# Altium PCB RPI 3.PcbDoc
Units mil, origin at the board's own origin, x right, y up, seen from the top; angles counter-clockwise.
Board outline 2558.74 x 2204.72 mil, 4 copper layers (Top Layer, Internal Plane 2, Internal Plane 1, Bottom Layer), stack 89.2 mil thick; 44 components, 50 nets, 159 pads, 17 vias.
Unrouted connection lines stored in the file: 1.
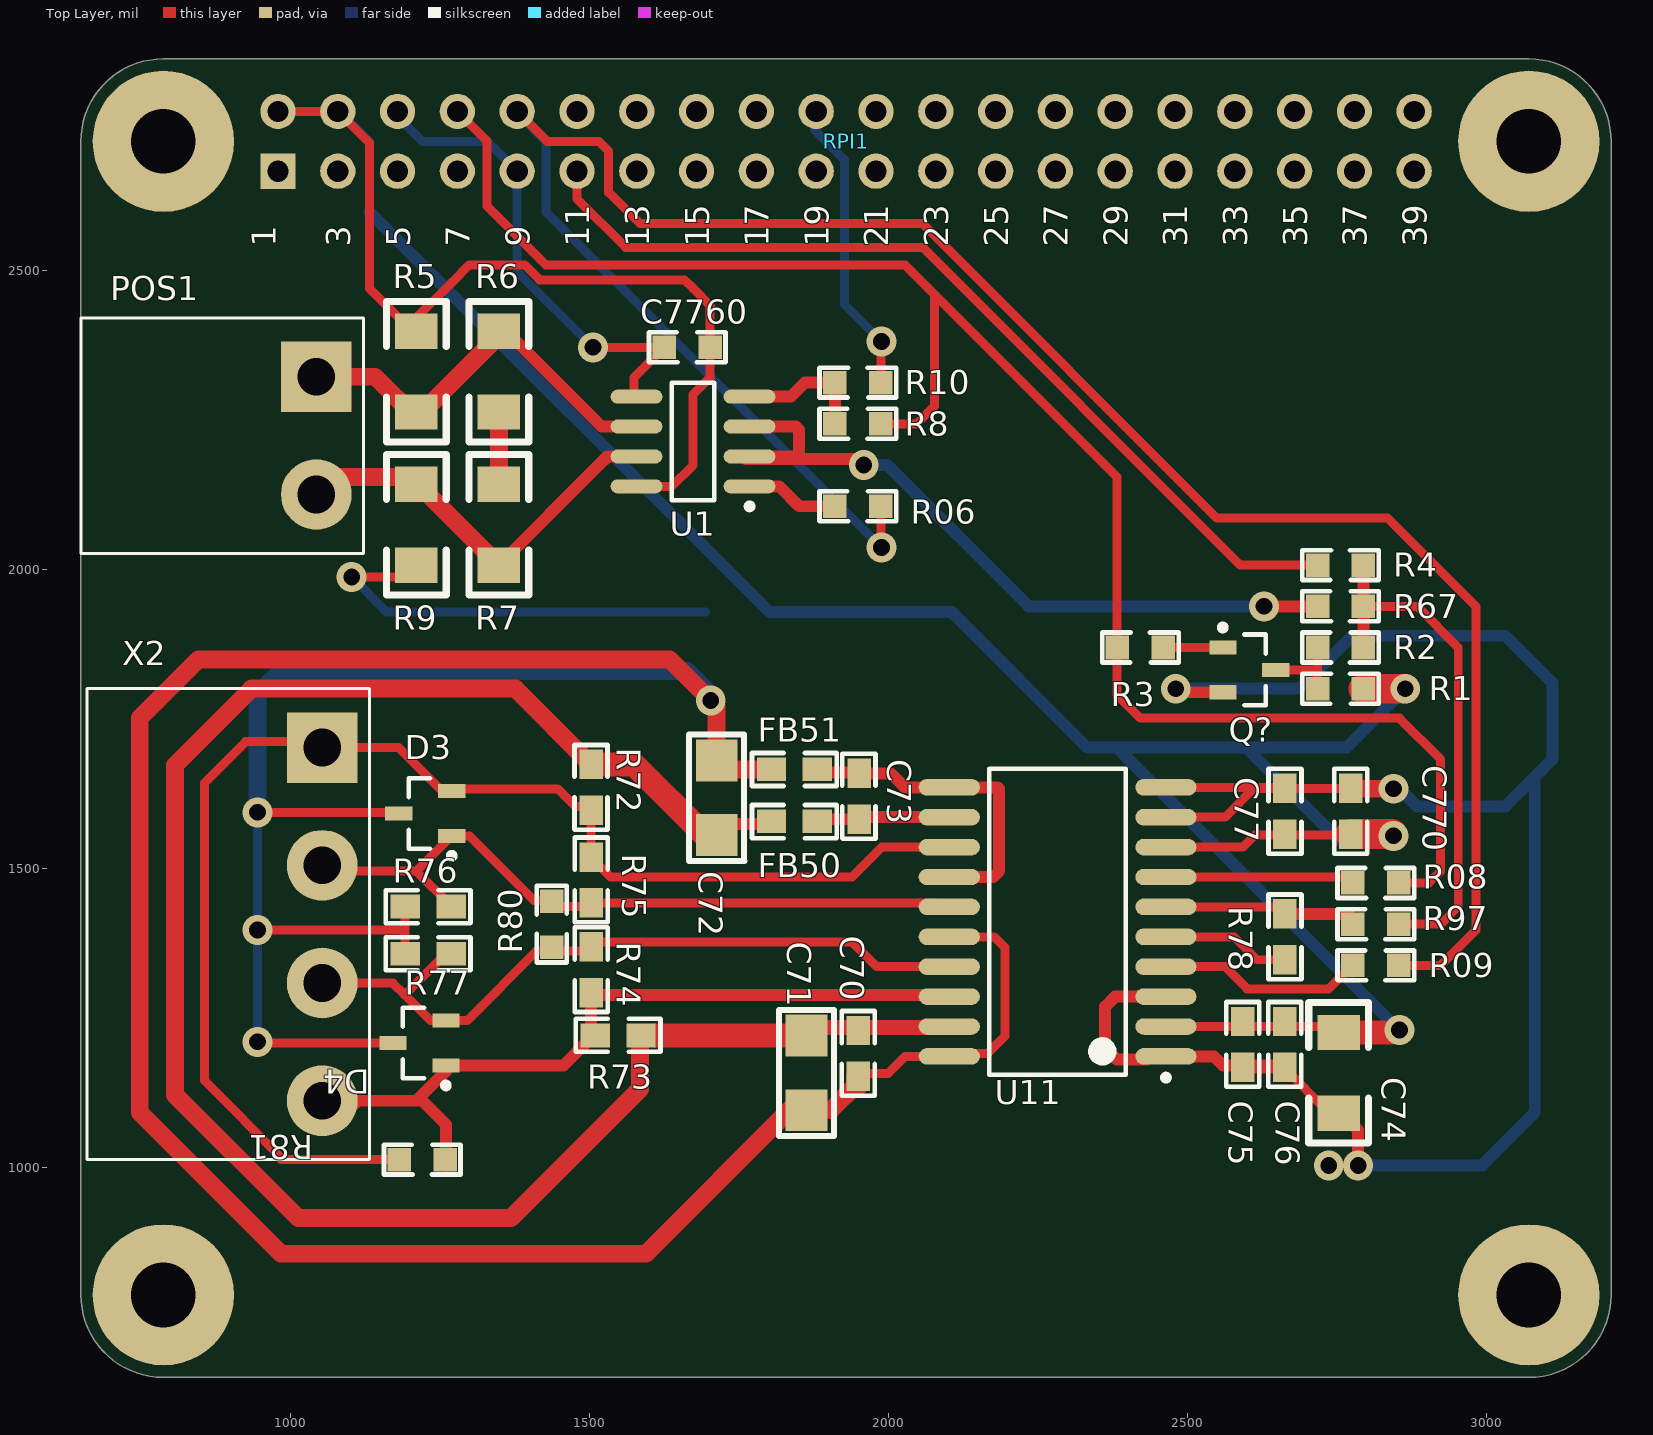
[diagram p0: Top Layer view]
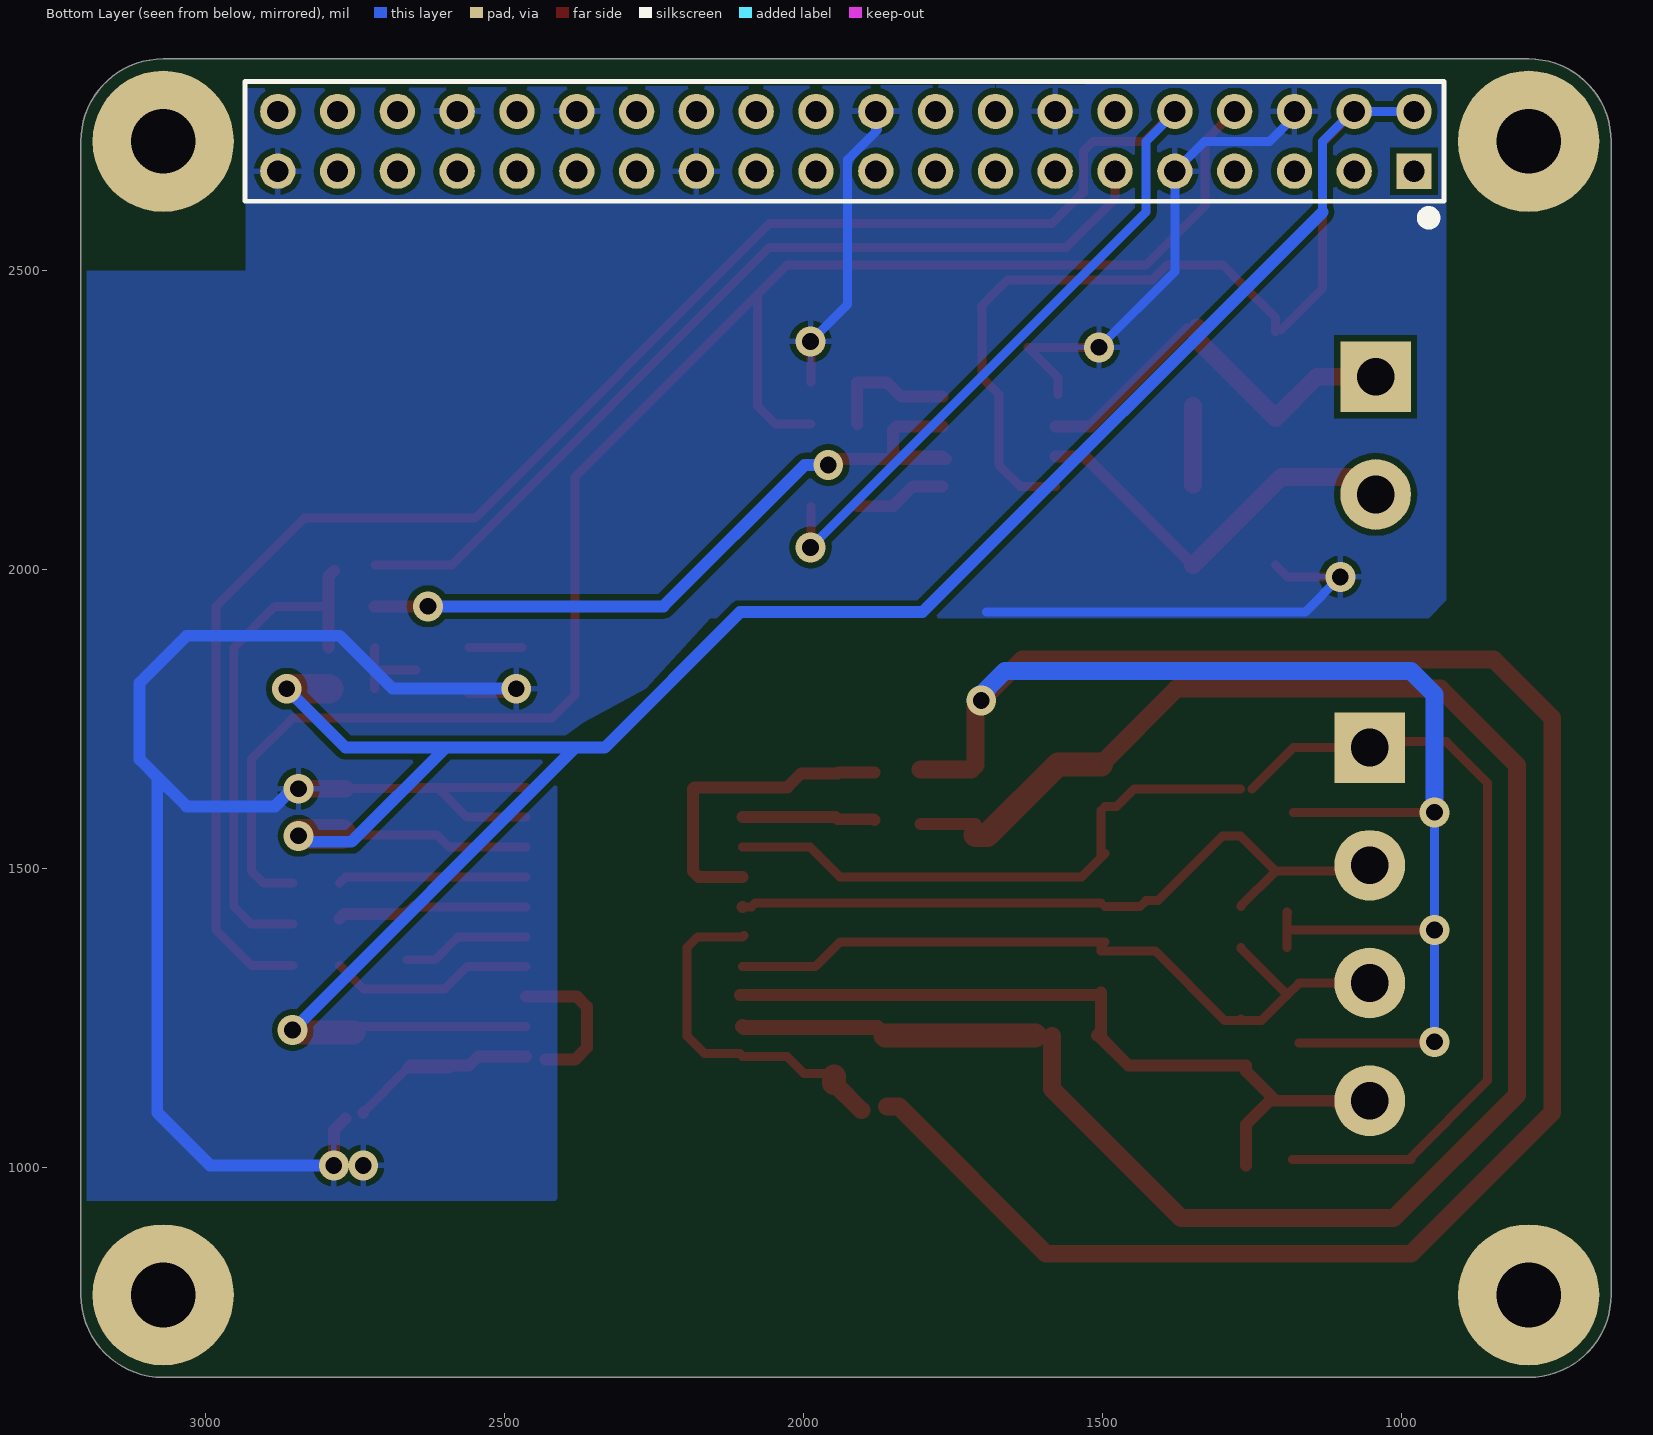
[diagram p1: Bottom Layer view, seen from below]
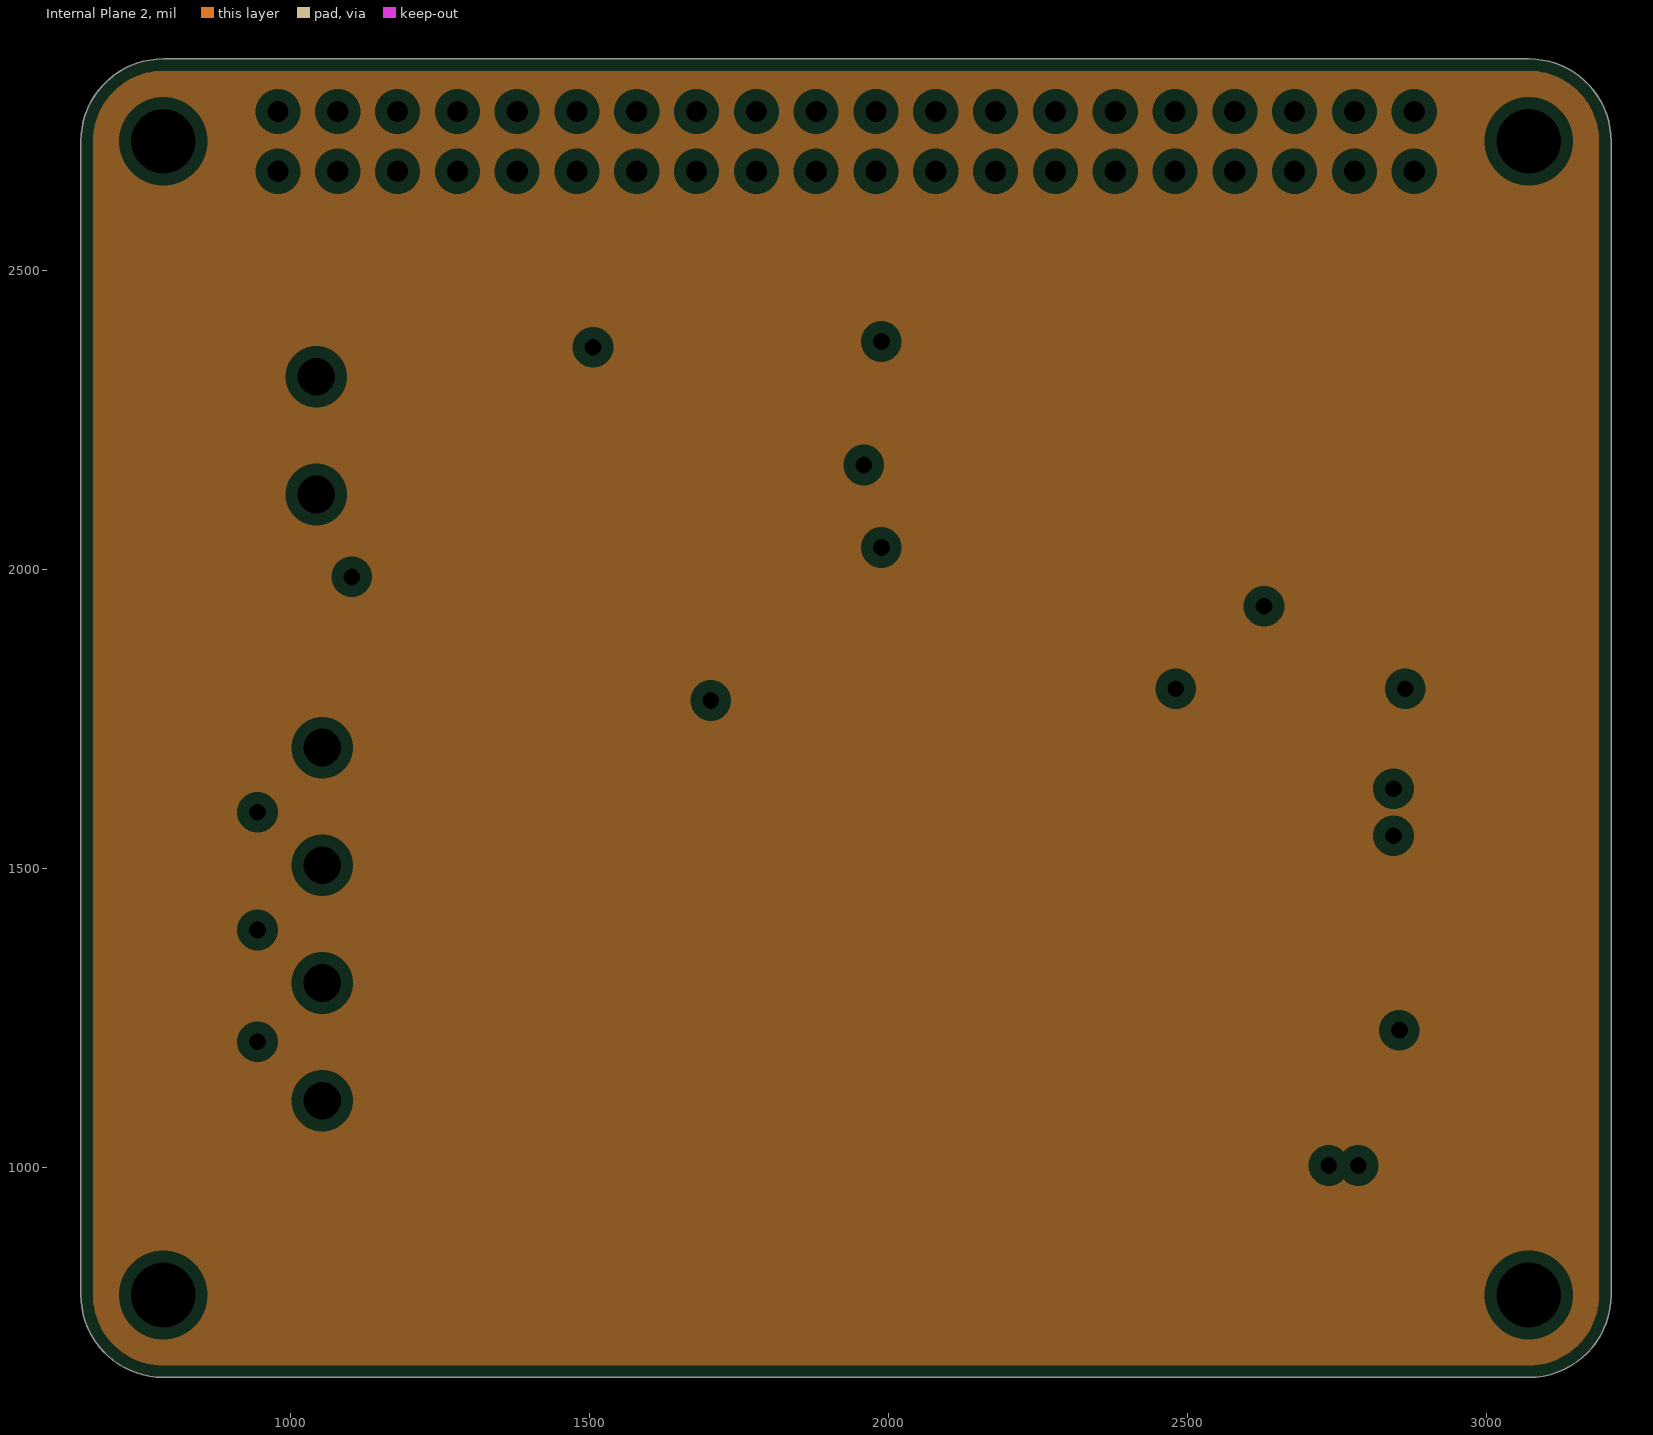
[diagram p2: Internal Plane 2, clearances drawn from the general rule]
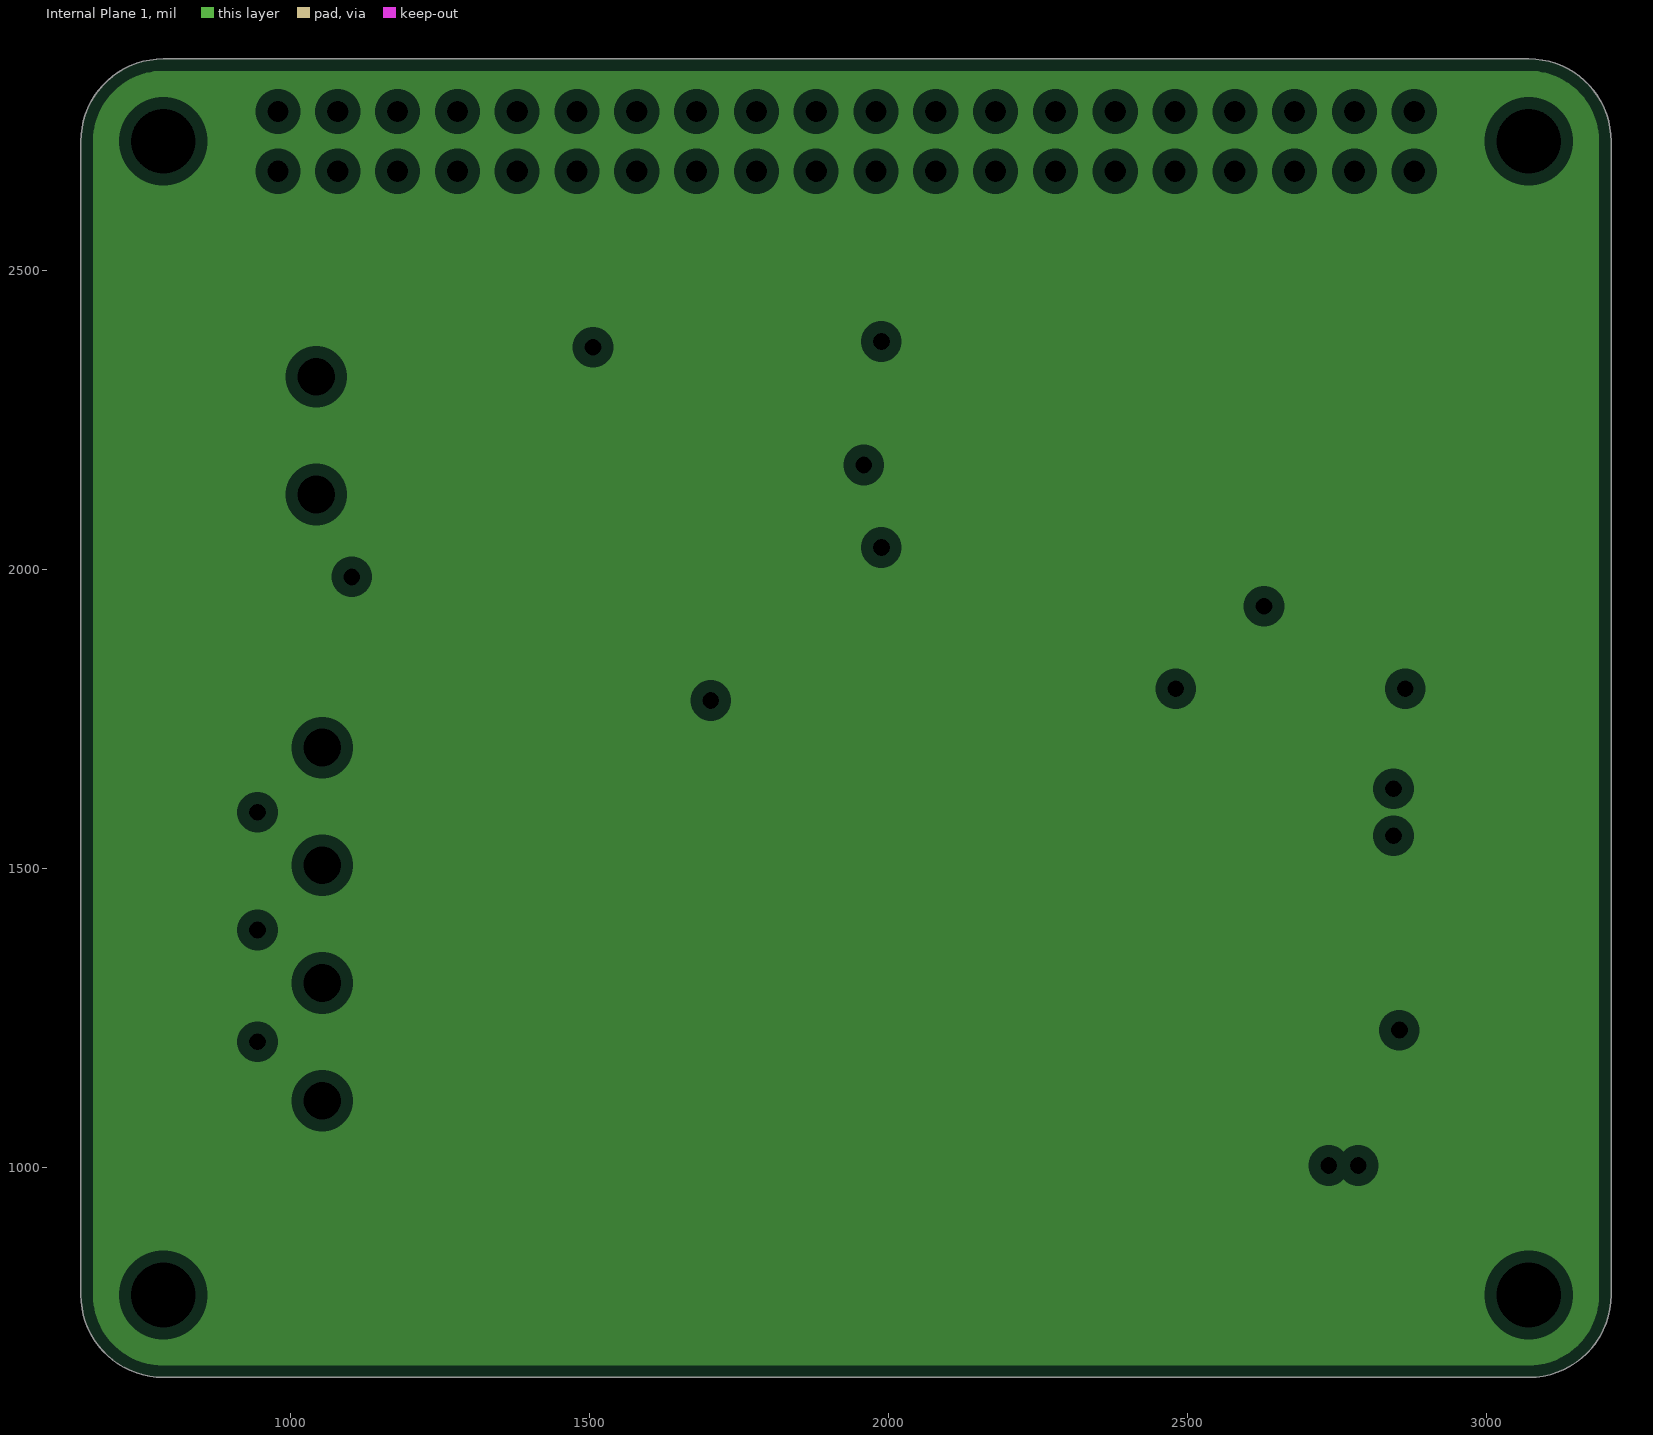
[diagram p3: Internal Plane 1, clearances drawn from the general rule]

## Layer stack, top to bottom
Top Solder: solder mask 0.8, Solder Resist, Dk 3.5
Top Layer: signal copper 2.1
Dielectric 1: dielectric 57, FR-4, Dk 4.6
Internal Plane 2: plane copper 1.4
Dielectric2: dielectric 12.6, FR-4, Dk 4.8
Internal Plane 1: plane copper 1.4
Dielectric3: dielectric 12.6, FR-4, Dk 4.8
Bottom Layer: signal copper 2.1
Bottom Solder: solder mask 0.8, Solder Resist, Dk 3.5

## Board outline
649.61,787.4 ccw(c787.4,787.4) 787.4,649.61 3070.87,649.61 ccw(c3070.71,787.24) 3208.35,787.4 3208.35,2716.54 ccw(c3070.71,2716.69) 3070.87,2854.33 787.4,2854.33 ccw(c787.4,2716.54) 649.61,2716.54

## Design rules (kind name [scope] priority, off if disabled: settings)
Clearance [All] p1: gap=10
PlaneClearance [All] p1: clearance=20
PlaneConnect [All] p1: planeconnectstyle=Relief reliefexpansion=20 reliefentries=4 reliefconductorwidth=10 reliefairgap=10
PolygonConnect [All] p1: connectstyle=Relief reliefconductorwidth=10 reliefentries=4 polygonreliefangle="90 Angle" airgapwidth=10
RoutingVias [All] p1: holewidth=28 width=50 viastyle="Through Hole" minholewidth=28 minwidth=50 maxholewidth=28 maxwidth=50
SolderMaskExpansion [All] p1: expansion=4
UnpouredPolygon [All] p1: allowunpoured=FALSE
Width [All] p1: maxlimit=30 minlimit=10 preferedwidth=10
27 further rules are at their usual default settings.

## Components (designator, comment, footprint, x,y, rotation, side; value= is the part's Value field where it differs from the comment)
C70 "1nF" 0603_LGP#1 1949.21,1191.32 r270 top
C71 "10nF" 1206#1 1862.78,1096.32 r90 top
C72 "10uf" 1206#1 1712.78,1556.32 r90 top
C73 "100nF" 0603_LGP#1 1950.78,1621.32 r90 top
C74 "10uF" 1206#2 2752.78,1226.32 r270 top
C75 "100nF" 0603_LGP#1 2592.78,1206.32 r90 top
C76 "10nF" 0603_LGP#1 2662.78,1206.32 r90 top
C77 "100nF" 0603_LGP#1 2662.78,1596.32 r270 top
C770 "10uF" 0603_LGP#1 2772.78,1596.32 r270 top
C7760 "10uF" 0603_LGP#2 1663.39,2372.05 r180 top
D3 "CDSOT23-SM712" SOT-23A_N 1269.69,1555.12 r270 top
D4 "CDSOT23-SM712" SOT-23A_N 1259.84,1171.26 r270 top
FB50 "" 0603_LGP#1 1842.78,1579.32 r180 top (schematic designator FB8)
FB51 "" 0603_LGP#1 1842.78,1666.32 r180 top
POS1 "Header 2" PHOENIX_RIGHT_A_2 1043.31,2224.41 r270 top
Q? "BC847AW" SOT-23A_N 2559.06,1870.08 r90 top
R1 "Res1" 0603_LGP#2 2755.91,1801.18 r0 top
R2 "Res1" 0603_LGP#2 2755.91,1870.08 r180 top
R3 "Res1" 0603_LGP#2 2421.26,1870.08 r0 top
R4 "Res1" 0603_LGP#2 2755.91,2007.87 r0 top
R5 "Res1" 1206#2 1210.63,2263.78 r90 top
R06 "Res1" 0603_LGP#2 1948.82,2106.3 r180 top
R6 "Res1" 1206#2 1348.43,2263.78 r90 top
R7 "Res1" 1206#2 1348.43,2007.87 r90 top
R08 "Res1" 0603_LGP#2 2814.96,1476.38 r180 top
R8 "Res1" 0603_LGP#2 1948.82,2244.09 r180 top
R09 "Res1" 0603_LGP#2 2814.96,1338.58 r180 top
R9 "Res1" 1206#2 1210.63,2007.87 r90 top
R10 "Res1" 0603_LGP#2 1948.82,2312.99 r0 top
R67 "Res1" 0603_LGP#2 2755.91,1938.98 r180 top
R72 "1.2k" 0603_LGP#1 1502.78,1636.32 r90 top
R73 "1.2k" 0603_LGP#1 1547.78,1221.32 r0 top
R74 "120R" 0603_LGP#1 1502.78,1331.32 r270 top
R75 "120R" 0603_LGP#1 1502.78,1481.32 r270 top
R76 "1.2k" 0603_LGP#1 1230.32,1437.01 r180 top
R77 "1.2k" 0603_LGP#1 1230.32,1358.27 r180 top
R78 "0" 0603_LGP#1 2662.78,1386.32 r270 top
R80 "0" 0603_LGP#2 1437.01,1407.48 r90 top
R81 "0" 0603_LGP#2 1220.47,1013.78 r180 top
R97 "Res1" 0603_LGP#2 2814.96,1407.48 r180 top
RPI1 "RPI GPIO Connector" RPI 1929.13,2716.54 r180 top
U1 "MAX485ESA" NSO8_N 1673.23,2214.57 r180 top
U11 "ADM2582E" SO20_W 2282.78,1411.32 r180 top
X2 "1757268" PHOENIX_RIGHT_A_4 1053.15,1407.48 r270 top

## Footprints (in the part's own frame and the unit in brackets; to place one, negate y for a bottom-side part, rotate by r counter-clockwise, add the part's x,y. Pads: shape width x height; smd on the part's side, far side on the other; paste and mask are expansions set on the pad)
0603_LGP#1 [mm]
  rect 1.25x1 smd: 1(-0.975,0) 2(0.975,0)
  silkscreen extent -1.8,-0.7 1.8,0.71
0603_LGP#2 [mm]
  rect 1x1 smd: 1(-0.975,0) 2(0.975,0)
  silkscreen extent -1.63,-0.64 1.63,0.64
1206#1 [mil] "Chip Resistor, 2-Leads, Body 3.2x1.6mm, IPC Medium Density"
  rect 70x70 smd: 1(0,0) 2(125,0)
  silkscreen extent -43,-46 168,46, body extent 3,-30 122,30, height 9
1206#2 [mil]
  rect 59.05x70.87 smd: 1(0,0) 2(135,0)
  silkscreen extent -50,-50 185,50
NSO8_N [mm] "SOIC, 8-Leads, Body 4.9x3.9mm, Pitch 1.27mm, IPC Medium Density"
  oval 2.2x0.6 smd: 1(-2.4,1.905) 2(-2.4,0.635) 3(-2.4,-0.635) 4(-2.4,-1.905) 5(2.4,-1.905) 6(2.4,-0.635) 7(2.4,0.635) 8(2.4,1.905)
  silkscreen extent -2.53,-2.5 0.9,2.88, body extent -2,-2.5 2,2.5, height 1.75
PHOENIX_RIGHT_A_2 [mm] "5.00mm - Open Horizhontal PCB Header - 02p"
  rect 3x3 hole 1.6: 1(-2.5,0)
  round 3 hole 1.6: 2(2.5,0)
  silkscreen extent -5,-10 5,2, body extent -5,-10 5,2, height 8.56
PHOENIX_RIGHT_A_4 [mm] "5.00mm - Open Horizhontal PCB Header - 04p"
  rect 3x3 hole 1.6: 1(-7.5,0)
  round 3 hole 1.6: 2(-2.5,0) 3(2.5,0) 4(7.5,0)
  silkscreen extent -10,-10 10,2, body extent -10,-10 10,2, height 8.56
RPI [mm]
  rect 1.5x1.5 hole 0.9: 1(24.13,1.27)
  round 1.5 hole 0.9: 2(24.13,-1.27) 3(21.59,1.27) 4(21.59,-1.27) 5(19.05,1.27) 6(19.05,-1.27) 7(16.51,1.27) 8(16.51,-1.27) 9(13.97,1.27) 10(13.97,-1.27) 11(11.43,1.27) 12(11.43,-1.27) 13(8.89,1.27) 14(8.89,-1.27) 15(6.35,1.27) 16(6.35,-1.27) 17(3.81,1.27) 18(3.81,-1.27) 19(1.27,1.27) 20(1.27,-1.27) 21(-1.27,1.27) 22(-1.27,-1.27) 23(-3.81,1.27) 24(-3.81,-1.27) 25(-6.35,1.27) 26(-6.35,-1.27) 27(-8.89,1.27) 28(-8.89,-1.27) 29(-11.43,1.27) 30(-11.43,-1.27) 31(-13.97,1.27) 32(-13.97,-1.27) 33(-16.51,1.27) 34(-16.51,-1.27) 35(-19.05,1.27) 36(-19.05,-1.27) 37(-21.59,1.27) 38(-21.59,-1.27) 39(-24.13,1.27) 40(-24.13,-1.27)
  body extent -25.52,-2.63 25.53,2.38, height 8.5
SO20_W [mm] "SOIC, 20-Leads, Body 12.8x7.5mm, Pitch 1.27mm, IPC Low Density"
  oval 2.6x0.7 smd: 1(-4.6,5.715) 2(-4.6,4.445) 3(-4.6,3.175) 4(-4.6,1.905) 5(-4.6,0.635) 6(-4.6,-0.635) 7(-4.6,-1.905) 8(-4.6,-3.175) 9(-4.6,-4.445) 10(-4.6,-5.715) 11(4.6,-5.715) 12(4.6,-4.445) 13(4.6,-3.175) 14(4.6,-1.905) 15(4.6,-0.635) 16(4.6,0.635) 17(4.6,1.905) 18(4.6,3.175) 19(4.6,4.445) 20(4.6,5.715)
  silkscreen extent -4.72,-6.5 2.9,6.74, body extent -3.75,-6.5 3.75,6.5, height 2.65
SOT-23A_N [mm]
  rect 0.6x1.15 smd: 1(0,0) 2(-1.9,0) 3(-0.95,-2.25)
  silkscreen extent -2.45,-1.83 0.97,0.13, body extent -2.45,-1.83 0.55,-0.42, height 1.09

## Part data
C70: library part "Cap Semi", "Multilayer Ceramic Capacitors MLCC - SMD/SMT 16volts 0.1uF 5% X7R"
C71 C76: library part Cap, "Cap Ceramic 0.01uF 25V X7R 10% SMD 0603 125C Paper T/R"
C72 C74: library part Cap, "Multilayer Ceramic Capacitors MLCC - SMD/SMT 10uF 25 Volts 10% X7R    Learn More"
C73 C75 C77 C770 C7760: library part Cap, "Multilayer Ceramic Capacitors MLCC - SMD/SMT 16volts 0.1uF 5% X7R"
D3 D4: library part SM712, "TVS DIODE 7VWM/12VWM SOT23"
FB50 FB51: library part Inductor, "Inductor"
POS1: "Header, 2-Pin"
Q?: "NPN General-purpose Transistor"
R1 R2 R3 R4 R5 R06 R6 R7 R08 R8 R09 R9 R10 R67 R97: "Resistor"
R72 R73 R76 R77: library part "Res Semi", "Res Thick Film 0603 1.2K Ohm 1% 0.1W(1/10W) ±100ppm/C Molded SMD Automotive Paper T/R"
R74 R75: library part "Res Semi", "Res Thick Film 0603 562 Ohm 1% 0.1W(1/10W) ±100ppm/C Molded SMD Automotive Paper T/R"
R78 R80 R81: library part "Res Semi", "Res Thick Film 0603 0 Ohm Molded SMD Automotive Paper T/R"
RPI1: library part "rpi connector", "GPIO Header for Raspberry Pi A+/B+/Pi 2/Pi 3 - 2x20"
U1: "Low-Power, Slew-Rate-Limited RS-485/RS-422 Transceiver"
U11: "Signal and Power Isolated RS-485  Transceiver with ±15 kV ESD Protection"
X2: library part "Header 4", "CONN HEADER RT ANG 4POS 5.08MM"

## Free pads (board coordinates)
  round 236.22 hole 108.27: ""(787.4,787.4) ""(787.4,2716.54) ""(3070.87,787.4) ""(3070.87,2716.54)

## Via types
v1: diameter 50, hole 28, Top Layer to Bottom Layer, 17 vias

## Nets (pads, with @x,y where several pads share a name; then routed paths per layer and width w, separated by ;. In a path a pad name is that pad's centre, name@x,y a point inside that pad or via, vN(x,y) a via of type N, cw(c..) or ccw(c..) an arc to the next point about the centre after c; other vN are vias at no path point)
+3V3: RPI1.1 RPI1.17
+5V: C74.1 C75.2 C76.2 C77.2 C770.2 C7760.1 R1.2 R5.2 RPI1.2 RPI1.4 U1.8 U11.2 U11.8 | length 5736.6
  Top Layer w15: RPI1.2@974.41,2765.75 975.2,2766.54 RPI1.2 RPI1.4 1131.89,2713.78 1131.89,2470.47 R5.2@1200.79,2401.57 ; R5.2 1210.63,2421.26 1269.69,2480.32 1299.21,2509.84 1391.81,2509.84 1416.81,2484.84 1658.86,2484.84 1673.23,2470.47 1701.77,2441.93 C7760.1 1701.77,2321.85 1673.23,2293.31 1673.23,2175.2 1637.6,2139.57 U1.8 ; U11.2 C74.1@2752.78,1236.32 ; U11.8 2592.78,1536.32 2612.78,1556.32 C770.2@2771.17,1556.32 ; v1@2841.67,1557.94 v1(2844.49,1555.12)
  Top Layer w40: C74.1 v1@2840.5,1226.32
  Top Layer w50: C770.2 v1@2841.67,1557.94 ; R1.2 v1(2864.17,1801.18)
  Bottom Layer w15: RPI1.2 RPI1.4 1081.89,2766.54 1131.89,2716.54 1131.89,2598.43
  Bottom Layer w20: 1131.89,2598.43 1801.18,1929.13 2106.3,1929.13 2332.68,1702.76 2381.89,1702.76 ; v1@2844.49,1545.28 2755.91,1545.28 2598.43,1702.76 ; v1(2854.33,1230.32) 2391.73,1692.91 2381.89,1702.76 ; v1(2864.17,1801.18) 2765.75,1702.76 2598.43,1702.76 ; 2381.89,1702.76 2598.43,1702.76
A: POS1.1 R5.1 R6.2 U1.6 | length 689.1
  Top Layer w20: R6.2@1358.27,2401.57 1520.28,2239.57 U1.6
  Top Layer w30: POS1.1 1141.73,2322.83 1210.63,2253.94 1342.11,2385.41 R6.2@1342.11,2405.1
A1: D4.1 R73.1 R74.2 R81.1 U11.18 X2.4 | length 1352.7
  Top Layer w20: X2.4@1053.15,1122.05 1082.68,1092.52 1082.68,1082.68 1112.2,1112.2 1220.47,1112.2 1259.84,1072.83 R81.1@1259.84,1003.94 ; 1210.63,1112.2 1259.84,1161.42 D4.1 1456.69,1171.26 1505.91,1220.47 1502.78,1223.6 R74.2 1506.35,1289.37 U11.18@2106.3,1289.37 ; R73.1@1508.07,1222.64 R73.1
A2: D3.2 R72.1 R75.1 R81.2 U11.13 X2.1 | length 2319.7
  Top Layer w15: 984.25,1013.78 988.27,1013.78 ; X2.1@1043.31,1712.6 925.2,1712.6 856.3,1643.7 856.3,1145.75 988.27,1013.78 ; X2.1@1053.15,1692.91 X2.1@1079.23,1666.83 ; X2.1 1181.1,1702.76 D3.2@1250,1633.86 ; R81.2 988.27,1013.78 ; D3.2@1269.68,1633.86 1446.85,1633.86 1476.38,1604.33 R72.1@1496.06,1604.33 ; R75.1@1496.06,1525.59 1535.43,1486.22 1938.98,1486.22 1989.08,1536.32 U11.13 ; R75.1 R72.1
B: POS1.2 R7.1 R9.2 U1.7 | length 693.9
  Top Layer w20: R7.1 1515.75,2175.2 1530.12,2189.57 U1.7
  Top Layer w30: POS1.2@1033.46,2125.98 1062.99,2155.51 1200.79,2155.51 R7.1
B1: D4.2 R74.1 R77.1 R80.1 U11.17 X2.3 | length 1263.1
  Top Layer w15: X2.3 1171.26,1309.06 1190.94,1289.37 ; D4.2 1234.25,1246.06 1190.94,1289.37 ; D4.2@1268.7,1249.02 1265.75,1246.06 1295.28,1246.06 1412.01,1362.8 1502.78,1362.8 R74.1 ; R77.1@1268.7,1368.11 1268.7,1367.13 1190.94,1289.37 ; R74.1@1496.06,1377.95 1938.98,1377.95 1980.61,1336.32 U11.17
B2: D3.1 R75.2 R76.1 R80.2 U11.15 X2.2 | length 1200.8
  Top Layer w15: X2.2@1053.15,1496.06 1210.63,1496.06 ; R76.1 1268.7,1437.99 1210.63,1496.06 ; R75.2@1496.06,1437.01 1437.01,1437.01 1427.17,1446.85 1407.48,1446.85 1299.21,1555.12 D3.1 1210.63,1496.06 ; R75.2 2080.68,1442.94 U11.15@2086.61,1437.01 ; U11.15@2086.61,1436.32 U11.15
DE: R78.1 R97.2 U11.6 | length 323.2
  Top Layer w15: U11.6 R78.1@2651.17,1436.32 ; R78.1@2662.78,1429.71 R78.1@2665.32,1427.17
  Top Layer w20: R78.1@2651.17,1436.32 R78.1 2768.2,1424.71 R97.2@2775.59,1417.32
GND: C74.2 C75.1 C76.1 C77.1 C770.1 C7760.2 Q?.2 R9.1 R10.2 RPI1.6 RPI1.9 RPI1.14 RPI1.20 RPI1.25 RPI1.30 RPI1.34 RPI1.39 U1.5 U11.1 U11.3 U11.9 U11.10 | length 5510.2
  Top Layer w15: v1(1102.36,1988.19) 1190.94,1988.19 R9.1 ; v1(1505.91,2372.05) C7760.2 1574.8,2321.85 U1.5@1574.8,2293.31 ; R10.2 1987.2,2380.91 v1(1988.19,2381.89) ; U11.9 2562.78,1586.32 2611.17,1634.71 C77.1 C77.1@2661.93,1633.86 ; U11.10 C77.1@2661.17,1636.32 ; C76.1@2657.48,1171.26 2660.8,1167.94 C74.2@2736.22,1092.52 ; C77.1@2667.32,1633.86 2668.17,1634.71 C770.1
  Top Layer w20: U11.1@2431.1,1181.1 2381.89,1181.1 2362.2,1200.79 2362.2,1269.69 2378.84,1286.32 U11.3 ; U11.1 2543.99,1186.32 2559.06,1171.26 C76.1@2657.48,1171.26 ; v1(2480.32,1801.18) 2486.22,1795.28 Q?.2 ; C75.1 C76.1@2660.8,1167.94 ; C74.2@2736.22,1091.32 C74.2@2736.22,1092.52 ; C74.2@2765.75,1082.68 2785.43,1062.99 v1(2785.43,1003.94)
  Top Layer w30: C770.1@2765.75,1633.86 v1(2844.49,1633.86)
  Bottom Layer w15: v1(1102.36,1988.19) 1161.42,1929.13 1693.96,1929.13 ; RPI1.6@1181.1,2755.91 1220.47,2716.54 1329.13,2716.54 RPI1.9 1379.13,2498.82 v1(1505.91,2372.05) v1@1515.75,2372.05 ; RPI1.20@1879.92,2765.75 1879.92,2736.22 1875.96,2736.22 1926.16,2686.01 1926.16,2443.92 v1(1988.19,2381.89) ; v1@2726.38,994.09 v1(2736.22,1003.94) v1@2736.22,994.09
  Bottom Layer w20: v1(2480.32,1801.18) 2687.01,1801.18 2775.59,1889.76 3031.5,1889.76 3110.24,1811.02 3110.24,1683.07 3080.71,1653.54 ; v1(2785.43,1003.94) 2992.13,1003.94 3080.71,1092.52 3080.71,1653.54 ; v1@2844.49,1643.7 2883.86,1604.33 3031.5,1604.33 3080.71,1653.54
GND_485: C70.2 C71.1 C72.2 D3.3 D4.3 FB51.2 R76.2 R77.2 U11.16 U11.20 | length 5887.5
  Top Layer w10: C72.2@1717.78,1681.32 C72.2@1719.24,1679.87
  Top Layer w15: v1@964.57,1397.64 1191.93,1397.64 ; v1@964.57,1594.49 D3.3@1181.1,1594.49 ; v1@966.54,1208.66 D4.3 ; R76.2@1190.94,1427.17 1191.93,1428.15 1191.93,1397.64 ; R77.2@1191.93,1368.11 1191.93,1397.64 ; C70.2@1949.21,1157.94 1999.39,1157.94 2027.78,1186.32 U11.20 ; U11.16@2099.68,1388.32 U11.16 2176.67,1386.32 2194.88,1368.11 2194.88,1220.47 2165.35,1190.94 U11.20@2106.3,1190.94
  Top Layer w30: C72.2@1712.6,1673.23 1719.5,1666.32 FB51.2 ; C72.2 1712.78,1771.47 v1(1702.76,1781.5) 1633.86,1850.39 846.46,1850.39 748.03,1751.97 748.03,1092.52 984.25,856.3 1594.49,856.3 1840.55,1102.36 C71.1@1860.24,1102.36 ; 1903.41,1096.32 1948.78,1141.69 C70.2@1948.82,1141.73
  Top Layer w40: C70.2@1948.78,1141.69 C70.2@1948.78,1152.94
  Bottom Layer w15: v1@935.04,1210.63 944.88,1220.47 v1(944.88,1397.64) v1(944.88,1594.49)
  Bottom Layer w30: v1(944.88,1594.49) 944.88,1791.34 984.25,1830.71 1663.39,1830.71 v1@1712.6,1781.5
  other v1: 944.88,1210.63
NetC73_1: C73.1 FB50.1 U11.12 | length 222.6
  Top Layer w20: FB50.1@1881.17,1581.32 1882.78,1582.94 1942.78,1582.94 1946.17,1586.32 U11.12
NetC73_2: C73.2 FB51.1 U11.11 U11.14 | length 535.9
  Top Layer w20: FB51.1@1881.17,1661.32 1941.16,1661.32 1942.78,1659.71 2003.78,1659.71 2027.17,1636.32 U11.11 2182.57,1636.32 2185.04,1633.86 2185.04,1496.06 2175.2,1486.22 U11.14@2106.3,1486.22
NetQ?_1: Q?.1 R3.2 | length 88.6
  Top Layer w15: R3.2@2470.47,1870.08 Q?.1
NetQ?_3: Q?.3 R1.1 R2.2 | length 139
  Top Layer w15: Q?.3 2714.57,1832.68 2716.54,1830.71 ; R2.2@2716.54,1870.08 2717.52,1869.1 R1.1
NetR2_1: R2.1 R4.2 R67.1 R97.1 | length 863.3
  Top Layer w15: R67.1 2883.86,1938.98 2952.76,1870.08 2952.76,1437.01 2923.23,1407.48 R97.1
  Top Layer w20: R4.2@2785.43,1998.03 2794.29,1989.17 R67.1 R2.1
NetR3_1: R3.1 R08.1 R8.1 RPI1.8 | length 2922.8
  Top Layer w15: RPI1.8@1279.53,2765.75 1328.74,2716.54 1328.74,2608.27 1427.17,2509.84 2027.56,2509.84 2057.09,2480.32 2076.77,2460.63 ; R8.1 2047.24,2244.1 2076.77,2273.62 2076.77,2460.63 ; R08.1 2903.54,1476.38 2923.23,1496.06 2923.23,1683.07 2854.33,1751.97 2421.26,1751.97 2381.89,1791.34 2381.89,2155.51 2303.15,2234.25 2293.31,2244.1 2076.77,2460.63
NetR4_1: R4.1 RPI1.11 | length 1537.1
  Top Layer w15: RPI1.11 1479.13,2620.67 1560.43,2539.37 2057.09,2539.37 2588.58,2007.87 R4.1@2716.54,2007.87
NetR06_1: R06.1 R09.1 RPI1.10 | length 3731.5
  Top Layer w15: RPI1.10 1429.13,2716.54 1515.75,2716.54 1532.11,2700.18 1532.11,2631.28 1584.65,2578.74 2057.09,2578.74 2549.21,2086.61 2834.65,2086.61 2982.28,1938.98 2982.28,1397.64 2923.23,1338.58 R09.1 ; R06.1 1987.21,2038.39 v1(1988.19,2037.4)
  Bottom Layer w15: RPI1.10@1377.95,2765.75 1427.17,2716.54 1427.17,2598.43 v1(1988.19,2037.4)
NetR6_1: R6.1 R7.2 | length 130.7
  Top Layer w30: R7.2 R6.1 R6.1@1348.43,2273.62
NetR06_2: R06.2 U1.1 | length 155.5
  Top Layer w20: U1.1 1817.13,2139.57 1850.39,2106.3 R06.2@1909.45,2106.3
NetR8_2: R8.2 R10.1 U1.4 | length 220.7
  Top Layer w20: U1.4 1836.81,2289.57 1860.24,2312.99 R10.1@1909.45,2312.99 ; R8.2@1909.45,2244.09 1910.43,2245.08 R10.1
NetR08_2: R08.2 U11.7 | length 315.8
  Top Layer w15: U11.7 2765.65,1486.32 R08.2@2775.59,1476.38
NetR09_2: R09.2 U11.4 | length 343.4
  Top Layer w15: U11.4 2562.78,1336.32 2599.89,1299.21 2736.22,1299.21 R09.2@2775.59,1338.58
NetR67_2: R67.2 U1.2 U1.3 | length 1266.8
  Top Layer w20: U1.2@1761.81,2185.04 1948.82,2185.04 v1(1958.66,2175.2) ; U1.2 1845.08,2189.57 1850.39,2194.88 1850.39,2234.25 1845.08,2239.57 U1.3 ; v1(2627.95,1938.98) R67.2
  Bottom Layer w20: v1(1958.66,2175.2) 1998.03,2175.2 2234.25,1938.98 v1(2627.95,1938.98)
NetRPI1_3: RPI1.3
NetRPI1_5: RPI1.5
NetRPI1_7: RPI1.7
NetRPI1_12: RPI1.12
NetRPI1_13: RPI1.13
NetRPI1_15: RPI1.15
NetRPI1_16: RPI1.16
NetRPI1_18: RPI1.18
NetRPI1_19: RPI1.19
NetRPI1_21: RPI1.21
NetRPI1_22: RPI1.22
NetRPI1_23: RPI1.23
NetRPI1_24: RPI1.24
NetRPI1_26: RPI1.26
NetRPI1_29: RPI1.29
NetRPI1_31: RPI1.31
NetRPI1_32: RPI1.32
NetRPI1_33: RPI1.33
NetRPI1_35: RPI1.35
NetRPI1_36: RPI1.36
NetRPI1_37: RPI1.37
NetRPI1_38: RPI1.38
NetRPI1_40: RPI1.40
RE: R78.2 U11.5 | length 214.8
  Top Layer w15: U11.5 2577.78,1386.32 2616.17,1347.94 R78.2
V_485: C70.1 C71.2 C72.1 FB50.2 R72.2 R73.2 U11.19 | length 3238.9
  Top Layer w20: C72.1@1712.78,1575.32 FB50.2@1804.39,1575.32 ; C71.2 C71.2@1876.17,1234.71
  Top Layer w25: C71.2@1876.17,1234.71 2100.06,1234.71 U11.19
  Top Layer w30: R72.2 1376.31,1801.18 935.04,1801.18 807.09,1673.23 807.09,1122.05 1013.15,915.98 1368.74,915.98 1584.65,1131.89 R73.2@1584.65,1220.47
  Top Layer w40: R72.2 1574.39,1674.71 1692.78,1556.32 C72.1 ; 1612.78,1221.32 C71.2
pads on no net: RPI1.27 RPI1.28

## Polygon pours and split planes (outlines as drawn)
GND on Bottom Layer "Bottom Layer-No Net" (solid, remove dead copper, pour order 2): 925.2,2814.96 925.2,1978.35 925.2,1948.82 954.72,1919.29 1771.65,1919.29 2155.51,1919.29 2156.27,1918.82 2263.78,1801.18 2367.22,1745.48 2411.42,1712.6 2411.42,944.88 3198.82,944.88 3198.82,2421.26 3198.82,2500 3120.08,2500 2933.07,2500 2933.07,2539.37 2933.07,2805.12
no net on Internal Plane 2 (split plane): 787.4,2834.23 3070.87,2834.23 3071.46,2834.29 3079.94,2833.96 3089.11,2832.87 3098.17,2831.07 3107.06,2828.56 3115.72,2825.37 3124.11,2821.5 3132.17,2816.99 3139.85,2811.86 3147.1,2806.14 3153.88,2799.87 3160.15,2793.09 3165.87,2785.83 3171,2778.15 3175.52,2770.1 3179.38,2761.71 3182.58,2753.04 3185.09,2744.15 3186.89,2735.09 3187.97,2725.92 3188.32,2717.22 3188.25,2716.54 3188.25,787.4 3188.32,786.72 3187.97,778.02 3186.89,768.84 3185.09,759.78 3182.58,750.89 3179.38,742.23 3175.52,733.84 3171,725.78 3165.87,718.1 3160.15,710.85 3153.88,704.07 3147.1,697.8 3139.85,692.08 3132.17,686.95 3124.11,682.44 3115.72,678.57 3107.06,675.37 3098.17,672.87 3089.11,671.06 3079.94,669.98 3071.46,669.64 3070.87,669.7 787.4,669.7 786.77,669.64 778.16,669.98 768.98,671.07 759.9,672.87 751,675.38 742.33,678.58 733.93,682.45 725.86,686.97 718.17,692.11 710.91,697.84 704.11,704.11 697.84,710.91 692.11,718.17 686.97,725.86 682.45,733.93 678.58,742.33 675.38,751 672.87,759.9 671.07,768.98 669.98,778.16 669.64,786.77 669.7,787.4 669.7,2716.54 669.64,2717.17 669.98,2725.78 671.07,2734.96 672.87,2744.03 675.38,2752.93 678.58,2761.61 682.45,2770.01 686.97,2778.08 692.11,2785.77 697.84,2793.03 704.11,2799.82 710.91,2806.1 718.17,2811.83 725.86,2816.96 733.93,2821.48 742.33,2825.36 751,2828.56 759.9,2831.07 768.98,2832.87 778.16,2833.96 786.77,2834.3
no net on Internal Plane 1 (split plane): 787.4,2834.23 3070.87,2834.23 3071.46,2834.29 3079.94,2833.96 3089.11,2832.87 3098.17,2831.07 3107.06,2828.56 3115.72,2825.37 3124.11,2821.5 3132.17,2816.99 3139.85,2811.86 3147.1,2806.14 3153.88,2799.87 3160.15,2793.09 3165.87,2785.83 3171,2778.15 3175.52,2770.1 3179.38,2761.71 3182.58,2753.04 3185.09,2744.15 3186.89,2735.09 3187.97,2725.92 3188.32,2717.22 3188.25,2716.54 3188.25,787.4 3188.32,786.72 3187.97,778.02 3186.89,768.84 3185.09,759.78 3182.58,750.89 3179.38,742.23 3175.52,733.84 3171,725.78 3165.87,718.1 3160.15,710.85 3153.88,704.07 3147.1,697.8 3139.85,692.08 3132.17,686.95 3124.11,682.44 3115.72,678.57 3107.06,675.37 3098.17,672.87 3089.11,671.06 3079.94,669.98 3071.46,669.64 3070.87,669.7 787.4,669.7 786.77,669.64 778.16,669.98 768.98,671.07 759.9,672.87 751,675.38 742.33,678.58 733.93,682.45 725.86,686.97 718.17,692.11 710.91,697.84 704.11,704.11 697.84,710.91 692.11,718.17 686.97,725.86 682.45,733.93 678.58,742.33 675.38,751 672.87,759.9 671.07,768.98 669.98,778.16 669.64,786.77 669.7,787.4 669.7,2716.54 669.64,2717.17 669.98,2725.78 671.07,2734.96 672.87,2744.03 675.38,2752.93 678.58,2761.61 682.45,2770.01 686.97,2778.08 692.11,2785.77 697.84,2793.03 704.11,2799.82 710.91,2806.1 718.17,2811.83 725.86,2816.96 733.93,2821.48 742.33,2825.36 751,2828.56 759.9,2831.07 768.98,2832.87 778.16,2833.96 786.77,2834.3

## Silkscreen, mask and mechanical layers (free items; w line width, h text height)
Top Overlay:
  text "1" at 975,2540.16 h40 r90
  text "3" at 1100,2540.16 h40 r90
  text "5" at 1200,2540.16 h40 r90
  text "7" at 1300,2540.16 h40 r90
  text "9" at 1400,2540.16 h40 r90
  text "11" at 1500,2540.16 h40 r90
  text "13" at 1600,2540.16 h40 r90
  text "15" at 1700,2540.16 h40 r90
  text "17" at 1800,2540.16 h40 r90
  text "19" at 1900,2540.16 h40 r90
  text "21" at 2000,2540.16 h40 r90
  text "23" at 2100,2540.16 h40 r90
  text "25" at 2200,2540.16 h40 r90
  text "27" at 2300,2540.16 h40 r90
  text "29" at 2400,2540.16 h40 r90
  text "31" at 2500,2540.16 h40 r90
  text "33" at 2600,2540.16 h40 r90
  text "35" at 2700,2540.16 h40 r90
  text "37" at 2800,2540.16 h40 r90
  text "39" at 2900,2540.16 h40 r90
Bottom Overlay:
  circle w19.68: c954.72,2588.58 r9.84
M2: Outline:
  the board outline again, w10